# Altium PCB 摄像头小王子(1).PcbDoc
Units mil, origin at the board's own origin, x right, y up, seen from the top; angles counter-clockwise.
Board outline 6000 x 4000 mil, 2 copper layers (Top Layer, Bottom Layer); 42 components, 54 nets, 213 pads, 50 vias.
Unrouted connection lines stored in the file: 3.
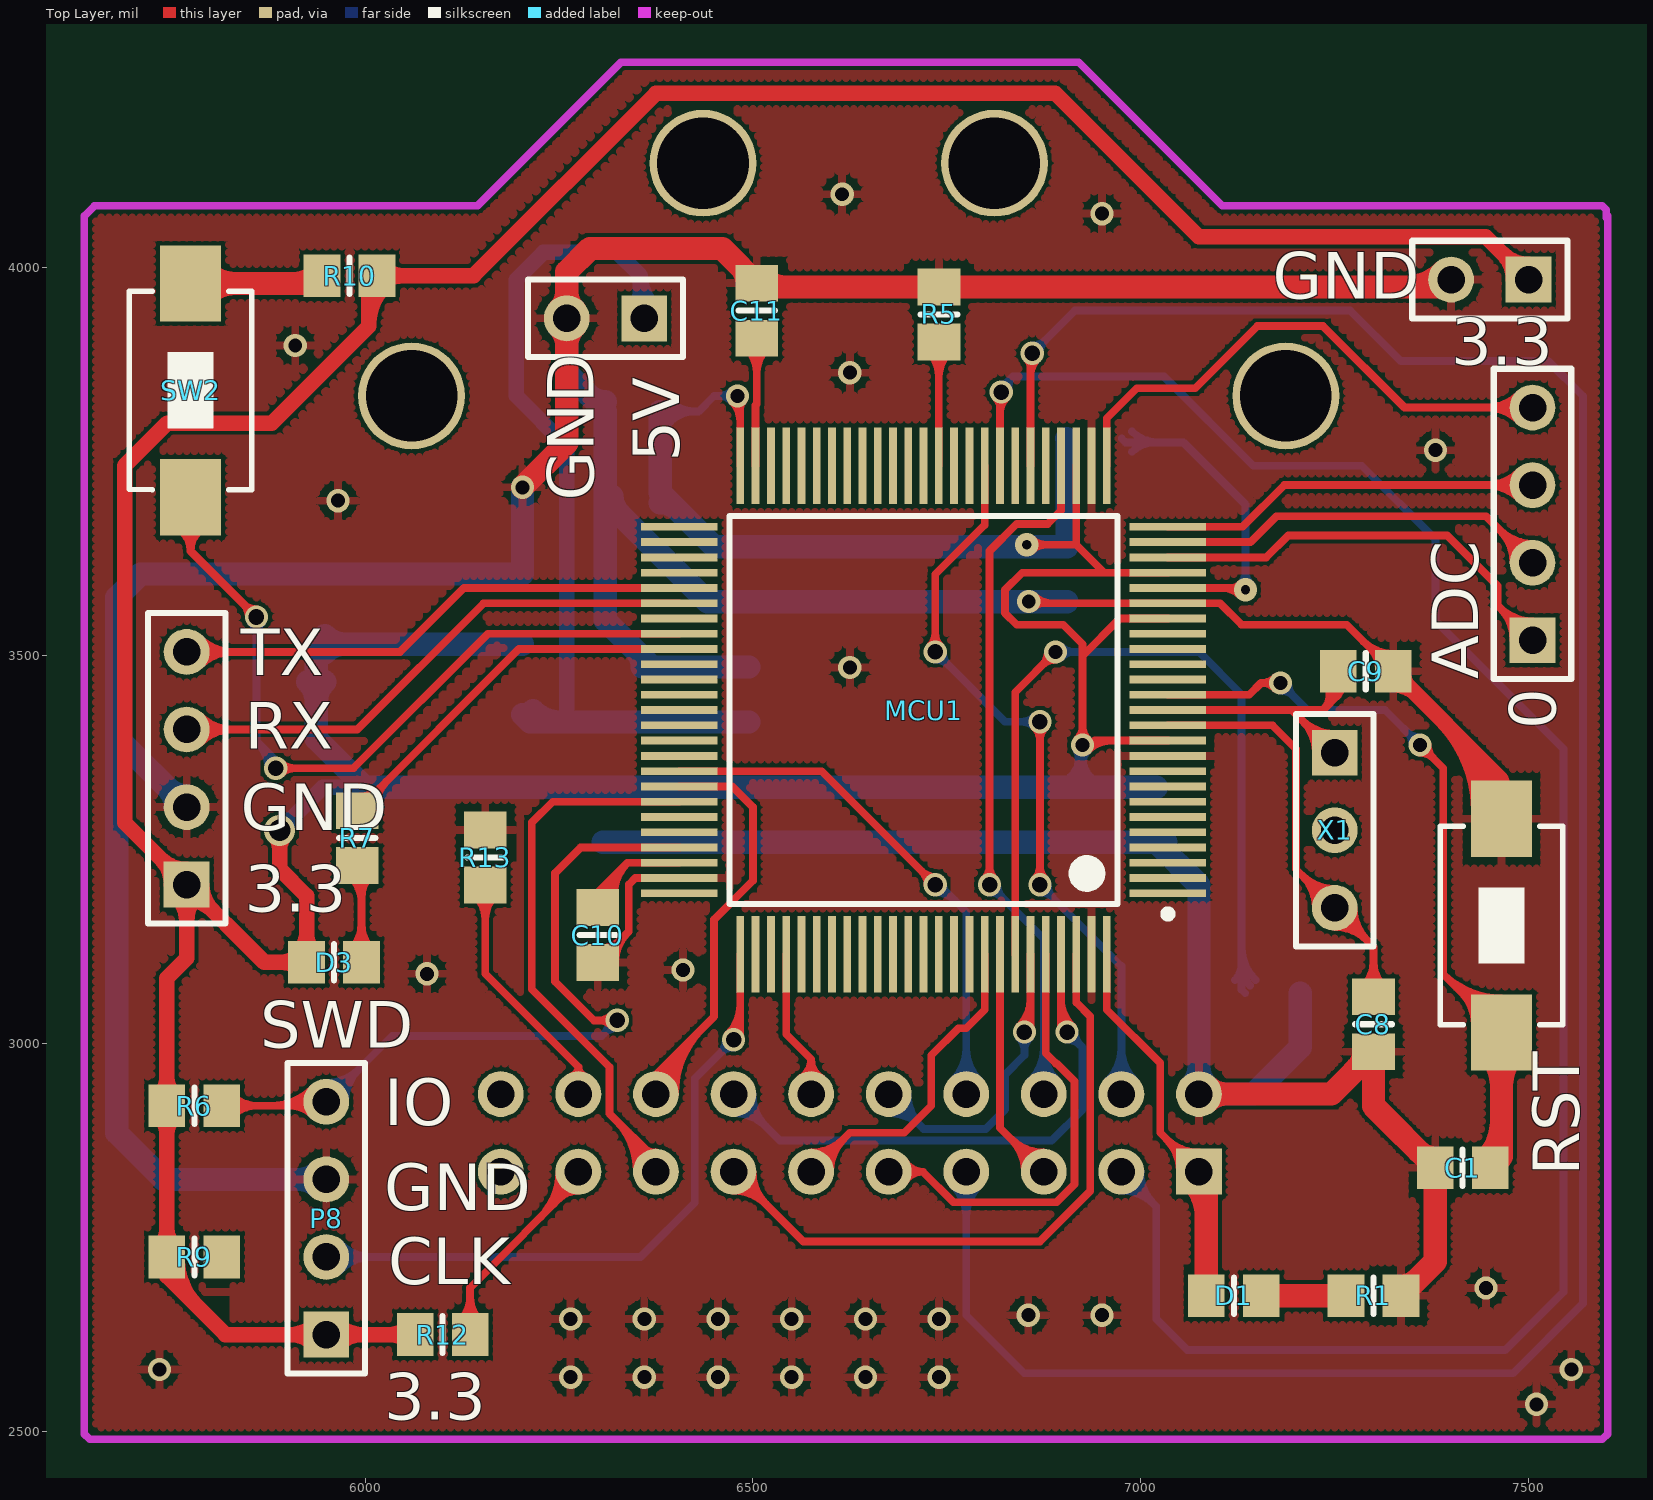
[diagram p0: Top Layer view]
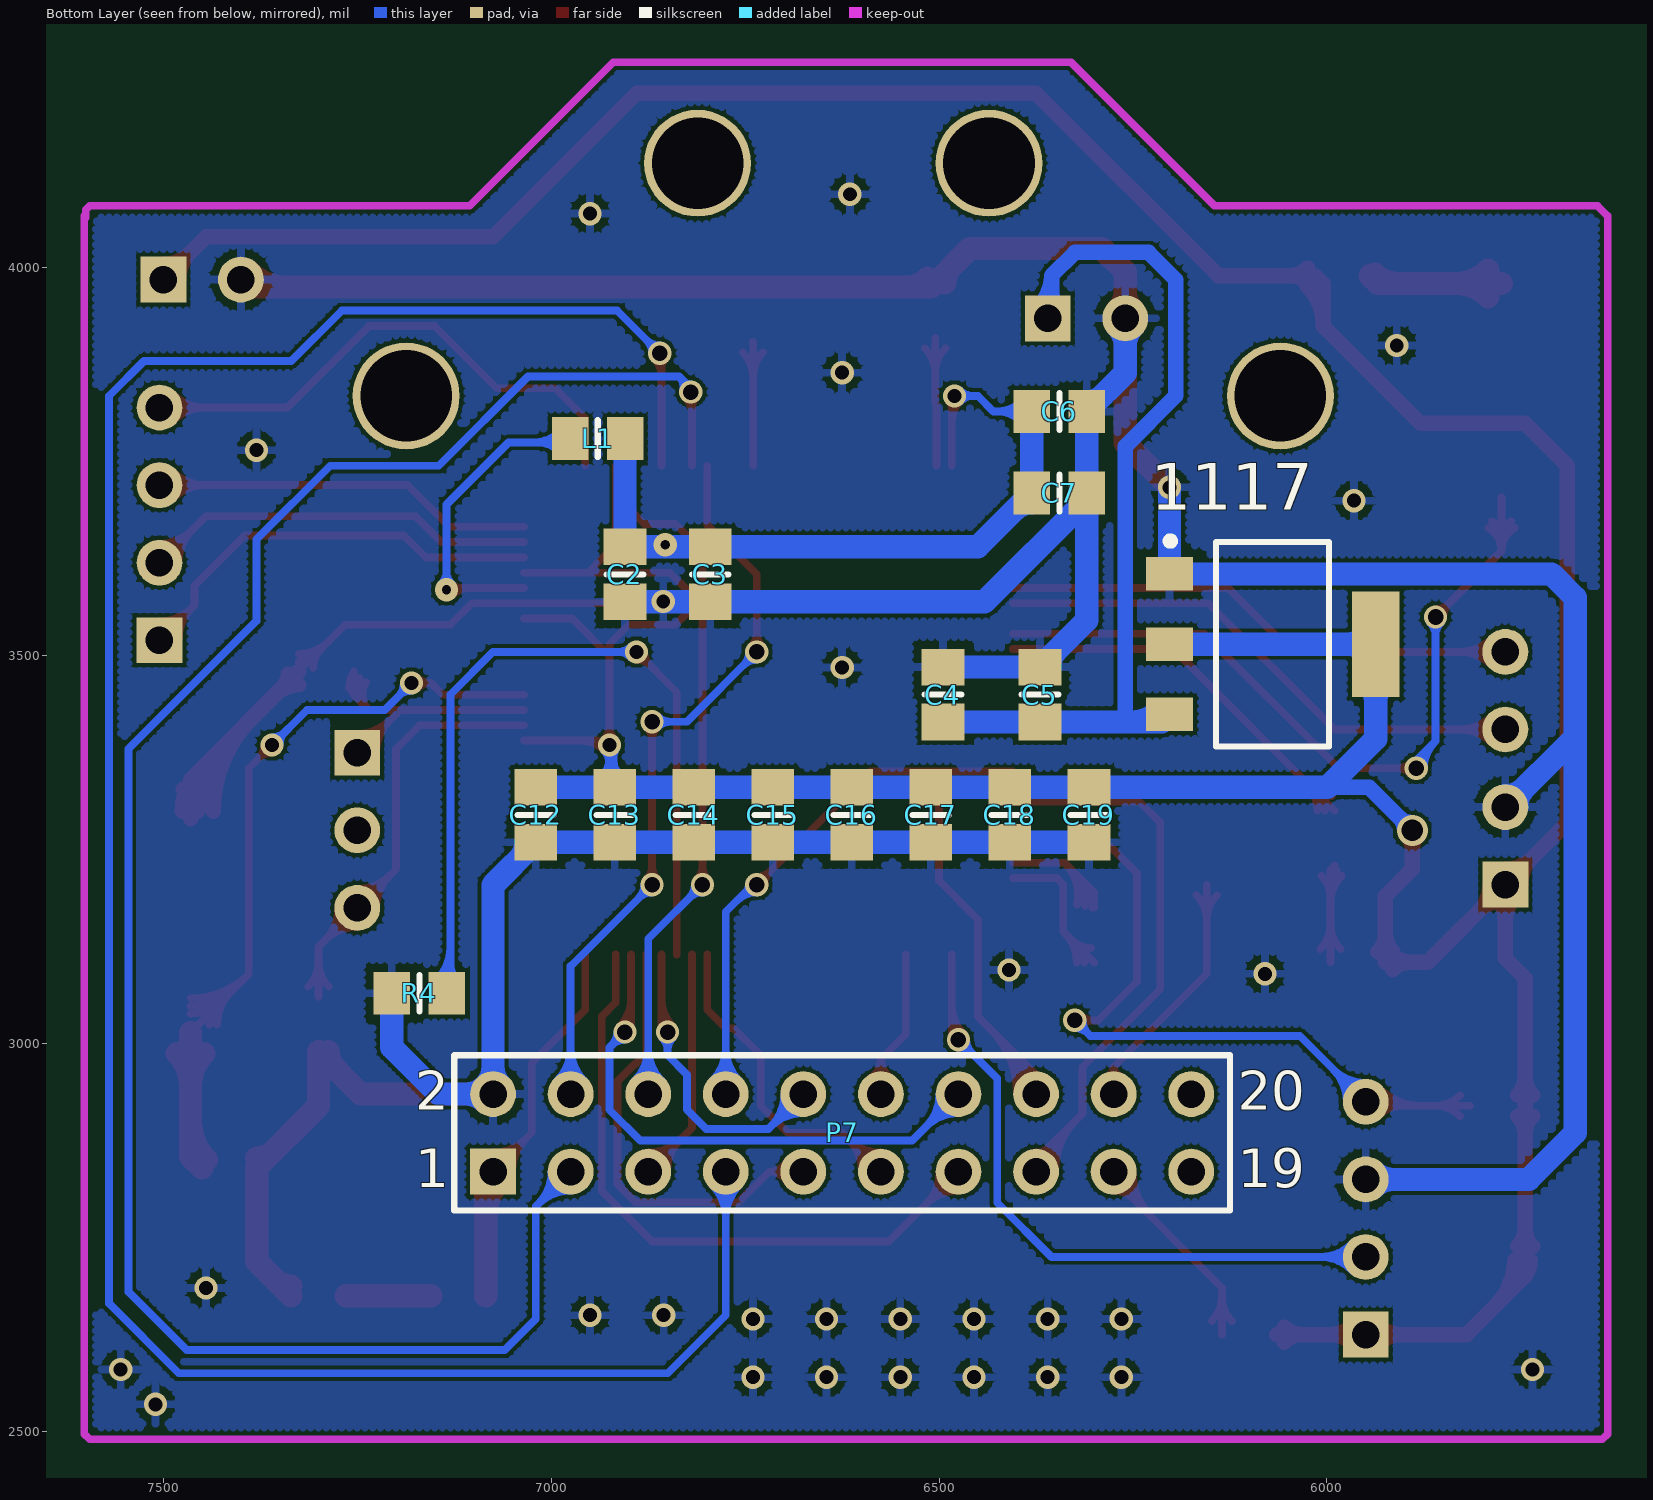
[diagram p1: Bottom Layer view, seen from below]

## Layer stack, top to bottom
Top Layer: signal copper 1.4
Dielectric: dielectric 12.6, FR-4, Dk 4.8
Bottom Layer: signal copper 1.4

## Board outline
3565,1210 9565,1210 9565,5210 3565,5210

## Design rules (kind name [scope] priority, off if disabled: settings)
Clearance [All] p1: gap=5
PolygonConnect [All] p1: connectstyle=Relief reliefconductorwidth=10 reliefentries=4 polygonreliefangle="90 Angle" airgapwidth=10
RoutingVias [All] p1: holewidth=12 width=30 viastyle="Through Hole" minholewidth=12 minwidth=30 maxholewidth=28 maxwidth=50
SolderMaskExpansion [All] p1: expansion=4
Width [All] p1: maxlimit=30 minlimit=10 preferedwidth=10
28 further rules are at their usual default settings.

## Components (designator, comment, footprint, x,y, rotation, side; value= is the part's Value field where it differs from the comment)
1117 "1117-3.3" SOT-223 6070,3515 r270 bottom (schematic designator 主控供电1)
ADC "Header 4" HDR1X4 7505,3520 r90 top (schematic designator PADC)
C1 "104" 6-0805_N 7415,2840 r0 top
C2 "Cap" 6-0805_N 6905,3605 r270 bottom
C3 "Cap" 6-0805_N 6795,3605 r270 bottom
C4 "104" 6-0805_N 6495,3450 r270 bottom
C5 "106" 6-0805_N 6370,3450 r270 bottom
C6 "104" 6-0805_N 6345,3815 r0 bottom
C7 "106" 6-0805_N 6345,3710 r0 bottom
C8 "20pF" 6-0805_N 7300,3025 r90 top
C9 "20pF" 6-0805_N 7290,3480 r180 top
C10 "2.2uF" 6-0805_N 6300,3140 r270 top
C11 "2.2uF" 6-0805_N 6505,3945 r270 top
C12 "106" 6-0805_N 7020,3295 r90 bottom
C13 "106" 6-0805_N 6918.12,3295 r90 bottom
C14 "106" 6-0805_N 6816.25,3295 r90 bottom
C15 "106" 6-0805_N 6714.38,3295 r90 bottom
C16 "104" 6-0805_N 6612.5,3295 r90 bottom
C17 "104" 6-0805_N 6510.62,3295 r90 bottom
C18 "104" 6-0805_N 6408.75,3295 r90 bottom
C19 "104" 6-0805_N 6306.88,3295 r90 bottom
D1 "3.3LED" 6-0805_N 7120,2675 r0 top
D3 "LED" 6-0805_N 5960,3105 r0 top
GND "Header 2" HDR1X2 7500,3985 r180 top (schematic designator P2)
GND "Header 2" HDR1X2 6360,3935 r180 top (schematic designator P1)
L1 "Inductor" 6-0805_N 6940,3780 r0 bottom
MCU1 "STM32F407V" LQFP100 6720,3430 r180 top
P7 "Header 10X2" HDR2X10 7075,2835 r180 bottom
P8 "Header 4" HDR1X4 5950,2625 r90 top
R1 "1K" 6-0805_N 7300,2675 r180 top
R4 "10K" 6-0805_N 7170,3065 r0 bottom
R5 "10K" 6-0805_N 6740,3940 r90 top
R6 "10K" 6-0805_N 5780,2920 r0 top
R7 "1K" 6-0805_N 5990,3265 r270 top
R9 "10K" 6-0805_N 5780,2725 r180 top
R10 "1K" 6-0805_N 5980,3990 r180 top
R12 "1K" 6-0805_N 6100,2625 r0 top
R13 "1K" 6-0805_N 6155,3240 r90 top
RST "switch" SW_PB2_A1 7465,3150 r0 top (schematic designator SW1)
SW2 "switch" SW_PB2_A1 5775,3840 r0 top
TX "Header 4" HDR1X4 5770,3205 r90 top (schematic designator P6)
X1 "xtal" HDR1X3 7250,3375 r270 top

## Footprints (in the part's own frame and the unit in brackets; to place one, negate y for a bottom-side part, rotate by r counter-clockwise, add the part's x,y. Pads: shape width x height; smd on the part's side, far side on the other; paste and mask are expansions set on the pad)
6-0805_N [mm] "Chip Resistor, Body 2.0x1.2mm, IPC Medium Density"
  rect 1.2x1.4 smd: 1(-0.9,0) 2(0.9,0)
  silkscreen extent 0,-0.6 0,0.6, body extent -1.07,-0.7 1.07,0.7, height 0.7
HDR1X2 [mm] "Connector; Header; 2 Position"
  rect 1.5x1.5 hole 0.9: 1(0,0)
  round 1.5 hole 0.9: 2(2.54,0)
  silkscreen extent -1.27,-1.27 3.81,1.27
HDR1X3 [mm] "Connector; Header; 3 Position"
  rect 1.5x1.5 hole 0.9: 1(0,0)
  round 1.5 hole 0.9: 2(2.54,0) 3(5.08,0)
  silkscreen extent -1.27,-1.27 6.35,1.27
HDR1X4 [mm] "Connector; Header; 4 Position"
  rect 1.5x1.5 hole 0.9: 1(0,0)
  round 1.5 hole 0.9: 2(2.54,0) 3(5.08,0) 4(7.62,0)
  silkscreen extent -1.27,-1.27 8.89,1.27
HDR2X10 [mm] "Connector; Header; 10x2 Position"
  rect 1.5x1.5 hole 0.9: 1(0,0)
  round 1.5 hole 0.9: 2(0,2.54) 3(2.54,0) 4(2.54,2.54) 5(5.08,0) 6(5.08,2.54) 7(7.62,0) 8(7.62,2.54) 9(10.16,0) 10(10.16,2.54) 11(12.7,0) 12(12.7,2.54) 13(15.24,0) 14(15.24,2.54) 15(17.78,0) 16(17.78,2.54) 17(20.32,0) 18(20.32,2.54) 19(22.86,0) 20(22.86,2.54)
  silkscreen extent -1.27,-1.27 24.13,3.81
LQFP100 [mm] "TSQFP, 100-Leads, Body 16.0x16.0mm (max), Pitch 0.50mm, IPC Medium Density"
  rect 2.5x0.254 smd: 1(-8,6) 2(-8,5.5) 3(-8,5) 4(-8,4.5) 5(-8,4) 6(-8,3.5) 7(-8,3) 8(-8,2.5) 9(-8,2) 10(-8,1.5) 11(-8,1) 12(-8,0.5) 13(-8,0) 14(-8,-0.5) 15(-8,-1) 16(-8,-1.5) 17(-8,-2) 18(-8,-2.5) 19(-8,-3) 20(-8,-3.5) 21(-8,-4) 22(-8,-4.5) 23(-8,-5) 24(-8,-5.5) 25(-8,-6) 51(8,-6) 52(8,-5.5) 53(8,-5) 54(8,-4.5) 55(8,-4) 56(8,-3.5) 57(8,-3) 58(8,-2.5) 59(8,-2) 60(8,-1.5) 61(8,-1) 62(8,-0.5) 63(8,0) 64(8,0.5) 65(8,1) 66(8,1.5) 67(8,2) 68(8,2.5) 69(8,3) 70(8,3.5) 71(8,4) 72(8,4.5) 73(8,5) 74(8,5.5) 75(8,6)
  rect 0.254x2.5 smd: 26(-6,-8) 27(-5.5,-8) 28(-5,-8) 29(-4.5,-8) 30(-4,-8) 31(-3.5,-8) 32(-3,-8) 33(-2.5,-8) 34(-2,-8) 35(-1.5,-8) 36(-1,-8) 37(-0.5,-8) 38(0,-8) 39(0.5,-8) 40(1,-8) 41(1.5,-8) 42(2,-8) 43(2.5,-8) 44(3,-8) 45(3.5,-8) 46(4,-8) 47(4.5,-8) 48(5,-8) 49(5.5,-8) 50(6,-8) 76(6,8) 77(5.5,8) 78(5,8) 79(4.5,8) 80(4,8) 81(3.5,8) 82(3,8) 83(2.5,8) 84(2,8) 85(1.5,8) 86(1,8) 87(0.5,8) 88(0,8) 89(-0.5,8) 90(-1,8) 91(-1.5,8) 92(-2,8) 93(-2.5,8) 94(-3,8) 95(-3.5,8) 96(-4,8) 97(-4.5,8) 98(-5,8) 99(-5.5,8) 100(-6,8)
  silkscreen extent -8.13,-6.35 6.35,6.8
SOT-223 [mm]
  rect 1.1x1.55 smd: 1(-2.3,-3.375) 2(0,-3.375) 3(2.3,-3.375)
  rect 3.45x1.55 smd: 4(0,3.375)
  silkscreen extent -3.5,-3.48 3.35,1.85, body extent -3.3,-3.94 3.3,3.43, height 0.8
SW_PB2_A1 [mm]
  rect 2x2.5 smd: 1(0,3.556) 2(0,-3.444)
  silkscreen extent -2,-3.19 2,3.31, body extent -2.03,-3.17 2.03,3.3, height 1.2

## Part data
1117: library part 1117M3-3.3
ADC P8 TX: "Header, 4-Pin"
C1 C4 C5 C6 C7 C8 C9 C10 C11 C12 C13 C14 C15 C16 C17 C18 C19: library part cap
C2 C3: "Capacitor"
D1: library part LED
GND GND: "Header, 2-Pin"
MCU1: library part stm32f407
P7: "Header, 10-Pin, Dual row"
R1 R4 R5 R6 R7 R9 R10 R12 R13: library part resistor, "small resistor"
RST SW2: library part switch-1

## Free pads (board coordinates)
  round 137.8 hole 118.11: 2(6060,3835) 2(6435.67,4135) 2(6811.34,4135) 2(7187.01,3835)

## Via types
v1: diameter 30, hole 18, Top Layer to Bottom Layer, 34 vias
v2: diameter 30, hole 20, Top Layer to Bottom Layer, 13 vias
v3: diameter 30, hole 12, Top Layer to Bottom Layer, 2 vias
v4: diameter 40, hole 28, Top Layer to Bottom Layer, 1 vias

## Nets (pads, with @x,y where several pads share a name; then routed paths per layer and width w, separated by ;. In a path a pad name is that pad's centre, name@x,y a point inside that pad or via, vN(x,y) a via of type N, cw(c..) or ccw(c..) an arc to the next point about the centre after c; other vN are vias at no path point)
+3.3: 1117.2 1117.4 C2.1 C3.1 C6.2 C7.2 C12.2 C13.2 C14.2 C15.2 C16.2 C17.2 C18.2 C19.2 D1.1 D3.1 GND.1@7500,3985 L1.1 MCU1.11 MCU1.19 MCU1.22 MCU1.28 MCU1.50 MCU1.75 MCU1.100 P7.1 P8.1 R6.1 R9.2 R10.1 R12.1 TX.1 | length 9893.1
  Top Layer w10: v1@6472.93,3827.93 cw(c6446.73,3801.73) 6483.78,3801.73 ; v1(6480,3835) 6483.78,3831.22 MCU1.50 ; 6483.78,3819.98 cw(c6495.02,3819.98) v1@6487.07,3827.93 ; v3(6853.15,3643.15) 6916.85,3643.15 ; v3@6860.22,3636.08 cw(c6877.29,3619.01) 6877.29,3643.15 cw(c6877.29,3667.29) v3@6860.22,3650.22 ; MCU1.28 6916.85,3643.15 ; v1@6917.93,3392.07 ccw(c6900.86,3409.14) 6925,3409.14 ccw(c6949.14,3409.14) v1@6932.07,3392.07 ; v1@6932.07,3377.93 cw(c6962.73,3347.27) 6962.73,3390.63 ; MCU1.100 6956.22,3043.78 7025,2975 7025,2885 P7.1 ; MCU1.11 6940.63,3390.63 6930,3380 v1(6925,3385) 6925,3500 ; MCU1.19 6973.11,3548.11 6925,3500 ; MCU1.22 6952.83,3607.17 ; P7.1@7050.47,2835 ccw(c6991.26,2835) 7033.13,2876.87 ccw(c7075,2918.74) P7.1@7075,2859.53 ; P7.1@7060.47,2835 ccw(c7025.4,2835) 7050.2,2859.8 ccw(c7075,2884.6) P7.1@7075,2849.53 ; 6916.85,3643.15 6952.83,3607.17 ; 6925,3500 6925,3515 6900,3540 6840,3540 6825,3555 6825,3585 6847.17,3607.17 6952.83,3607.17
  Top Layer w20: R9.2@5734.93,2738.57 ccw(c5711.68,2761.82) 5744.57,2761.82 ccw(c5777.45,2761.82) R9.2@5754.2,2738.57 ; R6.1@5734.93,2906.43 cw(c5711.68,2883.18) 5744.57,2883.18 cw(c5777.45,2883.18) R6.1@5754.2,2906.43 ; R6.1@5734.93,2933.57 ccw(c5711.68,2956.82) 5744.57,2956.82 ccw(c5777.45,2956.82) R6.1@5754.2,2933.57 ; R9.2@5738.19,2721.06 ccw(c5772.6,2721.06) 5748.27,2696.73 ; TX.1@5750.47,3205 ccw(c5703.33,3205) 5736.66,3238.34 ccw(c5770,3271.67) TX.1@5770,3224.53 ; TX.1@5756.19,3191.19 cw(c5722.86,3157.86) 5770,3157.86 cw(c5817.14,3157.86) TX.1@5783.81,3191.19 ; R9.2@5758.19,2721.06 ccw(c5840.88,2721.06) 5782.41,2662.59 ; TX.1@5770,3185.47 cw(c5770,3138.33) 5803.34,3171.66 cw(c5836.67,3205) TX.1@5789.53,3205 ; v4@5882.93,3267.93 cw(c5865.86,3250.86) 5890,3250.86 cw(c5914.14,3250.86) v4@5897.07,3267.93 ; v4(5890,3275) 5890,3225 5924.57,3190.43 D3.1 5870,3105 TX.1 ; D3.1@5914.93,3095.37 ccw(c5891.68,3072.11) 5891.68,3105 ccw(c5891.68,3137.89) D3.1@5914.93,3114.63 ; D3.1@5914.93,3118.57 ccw(c5891.68,3141.82) 5924.57,3141.82 ccw(c5957.45,3141.82) D3.1@5934.2,3118.57 ; P8.1@5936.19,2611.19 ccw(c5902.86,2577.86) 5902.86,2625 ccw(c5902.86,2672.14) P8.1@5936.19,2638.81 ; P8.1@5963.81,2611.19 cw(c5997.14,2577.86) 5997.14,2625 cw(c5997.14,2672.14) P8.1@5963.81,2638.81 ; 6005,3927.99 cw(c6073.51,3927.99) R10.1@6025.07,3976.43 ; R10.1@6025.07,3980.37 cw(c6048.32,3957.11) 6048.32,3990 cw(c6048.32,4022.89) R10.1@6025.07,3999.63 ; R12.1@6054.93,2615.37 ccw(c6031.68,2592.11) 6031.68,2625 ccw(c6031.68,2657.89) R12.1@6054.93,2634.63 ; R12.1 5820,2625 5744.57,2700.43 R9.2 R6.1 5744.57,3084.57 5770,3110 TX.1 ; GND.1@7480.47,3985 ccw(c7433.33,3985) 7466.66,4018.34 ccw(c7500,4051.67) GND.1@7500,4004.53 ; GND.1@7500,3985 7445,4040 7075,4040 6890,4225 6375,4225 6140,3990 R10.1 6005,3979.57 6005,3925 5880,3800 5745,3800 5690,3745 5690,3285 TX.1
  Top Layer w30: P7.1@7064.73,2824.73 cw(c7016.83,2776.83) 7084.57,2776.83 ; P7.1 7084.57,2825.43 D1.1
  Bottom Layer w10: C6.2 6430,3815 6450,3835 v1(6480,3835) ; C6.2@6393.6,3801.83 cw(c6425.39,3770.04) 6425.39,3815 cw(c6425.39,3859.96) C6.2@6393.6,3828.17 ; v1@6472.93,3827.93 ccw(c6455.86,3810.86) 6455.86,3835 ccw(c6455.86,3859.14) v1@6472.93,3842.07 ; C13.2@6908.89,3343.6 ccw(c6870.01,3382.48) v1@6925,3382.48 ; C13.2@6915.97,3336.53 ccw(c6894.15,3358.34) 6925,3358.34 ; v1@6916.34,3380 cw(c6893.51,3366.82) 6918.97,3359.99 ; v1@6917.93,3377.93 cw(c6900.86,3360.86) 6925,3360.86 cw(c6949.14,3360.86) v1@6932.07,3377.93 ; C13.2 6925,3337.31 v1(6925,3385) ; 6919.79,3363.03 cw(c6940.96,3357.36) v1@6930,3376.34 ; 6925,3368.3 ccw(c6959.93,3368.3) C13.2@6935.23,3343.6
  Bottom Layer w20: v4(5890,3275) 5945.43,3330.43 5999.57,3330.43 ; v4@5890,3285 ccw(c5890,3309.14) 5907.07,3292.07 ccw(c5924.14,3275) v4@5900,3275
  Bottom Layer w30: 1117.4@5926.16,3466.63 cw(c5899.68,3440.15) 5937.13,3440.15 cw(c5974.57,3440.15) 1117.4@5948.09,3466.63 ; 1117.4@5948.09,3504.03 cw(c5974.57,3477.55) 5974.57,3515 cw(c5974.57,3552.45) 1117.4@5948.09,3525.97 ; 1117.2 1117.4 5937.13,3392.87 5999.57,3330.43 C19.2 C18.2 C17.2 C16.2 C15.2 C14.2 C13.2 C12.2 ; C7.2@6380.43,3697.44 cw(c6380.43,3667.12) C7.2@6401.87,3688.56 ; C6.2 C7.2 6450,3640.43 C3.1 C2.1 6905,3779.57 L1.1
+5: 1117.3 C4.2 C5.2 GND.1@6360,3935 | length 1245.9
  Bottom Layer w20: 6260,3414.57 6260,3770 6195,3835 6195,3985 6230,4020 6325,4020 6355,3990 ; GND.1@6346.19,3948.81 ccw(c6324.93,3970.07) 6355,3970.07 ; GND.1@6360,3935 6355,3940 6355,3990 ; GND.1@6373.05,3949.53 cw(c6409.39,3990) 6355,3990
  Bottom Layer w30: 1117.3 6212.76,3414.57 6260,3414.57 C5.2 C4.2 ; 1117.3@6216.44,3429.15 ccw(c6251.66,3464.37) 6251.66,3414.57
ADC0: ADC.1 MCU1.23 | length 700.4
  Top Layer w10: MCU1.23 7161.85,3626.85 7190,3655 7395,3655 7460,3590 7460,3565 ADC.1 ; ADC.1@7480.47,3520 ccw(c7421.26,3520) 7463.13,3561.87 ccw(c7505,3603.74) ADC.1@7505,3544.53 ; ADC.1@7490.47,3520 ccw(c7455.4,3520) 7480.2,3544.8 ccw(c7505,3569.6) ADC.1@7505,3534.53
ADC1: ADC.2 MCU1.24 | length 656.9
  Top Layer w10: MCU1.24 7141.54,3646.54 7175,3680 7445,3680 ADC.2 ; ADC.2@7480.47,3620 ccw(c7421.26,3620) 7463.13,3661.87 ccw(c7505,3703.74) ADC.2@7505,3644.53 ; ADC.2@7490.47,3620 ccw(c7455.4,3620) 7480.2,3644.8 ccw(c7505,3669.6) ADC.2@7505,3634.53
ADC2: ADC.3 MCU1.25 | length 640.4
  Top Layer w10: MCU1.25 7131.22,3666.22 7185,3720 ADC.3 ; ADC.3@7487.66,3702.66 ccw(c7445.79,3660.79) 7445.79,3720 ccw(c7445.79,3779.21) ADC.3@7487.66,3737.34 ; ADC.3@7494.73,3709.73 ccw(c7469.93,3684.93) 7469.93,3720 ccw(c7469.93,3755.07) ADC.3@7494.73,3730.27
ADC3: ADC.4 MCU1.26 | length 850.8
  Top Layer w10: MCU1.26 6956.22,3806.22 6995,3845 7070,3845 7150,3925 7235,3925 7340,3820 ADC.4 ; ADC.4@7487.66,3802.66 ccw(c7445.79,3760.79) 7445.79,3820 ccw(c7445.79,3879.21) ADC.4@7487.66,3837.34 ; ADC.4@7494.73,3809.73 ccw(c7469.93,3784.93) 7469.93,3820 ccw(c7469.93,3855.07) ADC.4@7494.73,3830.27
BLUERX: MCU1.56 TX.3 | length 850.6
  Top Layer w10: TX.3 5990,3405 6152.8,3567.8 MCU1.56 ; TX.3@5780.27,3394.73 cw(c5805.07,3369.93) 5805.07,3405 cw(c5805.07,3440.07) TX.3@5780.27,3415.27 ; TX.3@5787.34,3387.66 cw(c5829.21,3345.79) 5829.21,3405 cw(c5829.21,3464.21) TX.3@5787.34,3422.34
BLUETX: MCU1.55 TX.4 | length 817.3
  Top Layer w10: TX.4 6045,3505 6127.48,3587.48 MCU1.55 ; TX.4@5780.27,3494.73 cw(c5805.07,3469.93) 5805.07,3505 cw(c5805.07,3540.07) TX.4@5780.27,3515.27 ; TX.4@5787.34,3487.66 cw(c5829.21,3445.79) 5829.21,3505 cw(c5829.21,3564.21) TX.4@5787.34,3522.34
CAM_SCL: MCU1.33 P7.3 | length 2788.4
  Top Layer w10: v2@6812.93,3832.93 cw(c6799.66,3819.66) 6818.43,3819.66 ; MCU1.33 6818.43,3838.43 v2(6820,3840) ; 6818.43,3812.06 cw(c6847.94,3812.06) v2@6827.07,3832.93
  Bottom Layer w10: v2(6820,3840) 6820,3845 6835,3860 ; v2@6820,3850 ccw(c6820,3862.07) 6828.54,3853.54 ; v2@6829.77,3842.14 cw(c6848.71,3846.29) 6835,3860 ; P7.3@6975,2810.47 cw(c6975,2751.26) 7016.87,2793.13 cw(c7058.74,2835) P7.3@6999.53,2835 ; P7.3@6975,2820.47 cw(c6975,2785.4) 6999.8,2810.2 cw(c7024.6,2835) P7.3@6989.53,2835 ; P7.3 7020,2790 7020,2645 7060,2605 7470,2605 7545,2680 7545,3380 7380,3545 7380,3650 7285,3745 7145,3745 7030,3860 6835,3860
CAM_SDA: MCU1.34 P7.4 | length 1337.8
  Top Layer w10: v2@6727.93,3512.07 ccw(c6710.86,3529.14) 6735,3529.14 ccw(c6759.14,3529.14) v2@6742.07,3512.07 ; v2(6735,3505) 6735,3605 6798.74,3668.74 MCU1.34 ; v2@6862.93,3212.07 ccw(c6845.86,3229.14) 6870,3229.14 ccw(c6894.14,3229.14) v2@6877.07,3212.07 ; v2@6862.93,3407.93 cw(c6845.86,3390.86) 6870,3390.86 cw(c6894.14,3390.86) v2@6877.07,3407.93 ; v2(6870,3205) v2(6870,3415)
  Bottom Layer w10: v2@6735,3495 cw(c6735,3470.86) 6752.07,3487.93 cw(c6769.14,3505) v2@6745,3505 ; v2(6735,3505) 6825,3415 v2(6870,3415) ; v2@6862.93,3407.93 ccw(c6845.86,3390.86) 6845.86,3415 ccw(c6845.86,3439.14) v2@6862.93,3422.07 ; v2@6870,3195 cw(c6870,3170.86) 6887.07,3187.93 cw(c6904.14,3205) v2@6880,3205 ; v2(6870,3205) 6975,3100 P7.4 ; P7.4@6957.66,2952.34 ccw(c6915.79,2994.21) 6975,2994.21 ccw(c7034.21,2994.21) P7.4@6992.34,2952.34 ; P7.4@6964.73,2945.27 ccw(c6939.93,2970.07) 6975,2970.07 ccw(c7010.07,2970.07) P7.4@6985.27,2945.27
CLK: MCU1.67 P7.8 | length 911.1
  Top Layer w10: MCU1.67 6588.74,3351.26 v2(6735,3205) ; v2@6725,3205 ccw(c6700.86,3205) 6717.93,3222.07 ccw(c6735,3239.14) v2@6735,3215
  Bottom Layer w10: v2@6735,3195 cw(c6735,3158.79) 6760.61,3184.39 ; v2(6735,3205) 6735,3210 6775,3170 P7.8 ; v2@6745,3205 ccw(c6757.07,3205) 6748.54,3196.46 ; P7.8@6757.66,2952.34 ccw(c6715.79,2994.21) 6775,2994.21 ccw(c6834.21,2994.21) P7.8@6792.34,2952.34 ; P7.8@6764.73,2945.27 ccw(c6739.93,2970.07) 6775,2970.07 ccw(c6810.07,2970.07) P7.8@6785.27,2945.27
DCMI_D0: MCU1.68 P7.16 | length 789.6
  Top Layer w10: P7.16@6369.53,2935 cw(c6416.67,2935) 6383.34,2968.34 ; P7.16 6375,2960 6450,3035 6450,3160 6500,3210 6500,3305 6473.43,3331.57 MCU1.68 ; P7.16@6379.53,2935 cw(c6450.81,2935) 6400.41,2985.41 ; P7.16@6389.53,2935 cw(c6484.96,2935) 6417.48,3002.48 ; P7.16@6399.53,2935 cw(c6519.1,2935) 6434.55,3019.55
DCMI_D1: MCU1.69 P7.15 | length 903.5
  Top Layer w10: 6322.52,2902.48 cw(c6255.04,2835) P7.15@6350.47,2835 ; 6339.59,2885.41 cw(c6289.19,2835) P7.15@6360.47,2835 ; 6356.66,2868.34 cw(c6323.33,2835) P7.15@6370.47,2835 ; 6358.74,2866.26 ccw(c6375,2882.53) P7.15@6375,2859.53 ; P7.15 6375,2850 6315,2910 6315,2970 6215,3070 6215,3285 6241.89,3311.89 MCU1.69
DCMI_D2: MCU1.97 P7.14 | length 950
  Top Layer w10: 6897.17,3033.91 ccw(c6923.91,3033.91) v2(6905,3015) 6897.17,3022.83 MCU1.97 ; 6897.17,3058.06 ccw(c6948.06,3058.06) v2@6912.07,3022.07
  Bottom Layer w10: P7.14@6475,2910.47 cw(c6475,2851.26) 6516.87,2893.13 cw(c6558.74,2935) P7.14@6499.53,2935 ; P7.14@6475,2920.47 cw(c6475,2885.4) 6499.8,2910.2 cw(c6524.6,2935) P7.14@6489.53,2935 ; P7.14 6535,2875 6885,2875 6925,2915 6925,2995 v2(6905,3015) ; v2@6905,3005 cw(c6905,2980.86) 6922.07,2997.93 cw(c6939.14,3015) v2@6915,3015
DCMI_D3: MCU1.98 P7.13 | length 984.9
  Top Layer w10: P7.13@6475,2810.47 cw(c6475,2751.26) 6516.87,2793.13 cw(c6558.74,2835) P7.13@6499.53,2835 ; P7.13@6475,2820.47 cw(c6475,2785.4) 6499.8,2810.2 cw(c6524.6,2835) P7.13@6489.53,2835 ; P7.13 6565,2745 6870,2745 6935,2810 6935,3035 6916.85,3053.15 MCU1.98
DCMI_D4: MCU1.79 P7.12 | length 251.3
  Top Layer w10: MCU1.79 6542.83,3012.17 6575,2980 ; P7.12@6561.71,2955.61 ccw(c6545.99,2980) 6575,2980 ; P7.12 6575,2980 ; P7.12@6588.29,2955.61 cw(c6604.01,2980) 6575,2980
DCMI_D5: MCU1.92 P7.11 | length 567.7
  Top Layer w10: P7.11 6625,2885 6695,2885 6730,2920 6730,2985 6765,3020 6775,3020 6798.74,3043.74 MCU1.92 ; P7.11@6575,2849.53 ccw(c6575,2884.6) 6599.8,2859.8 ccw(c6624.6,2835) P7.11@6589.53,2835 ; P7.11@6575,2859.53 ccw(c6575,2918.74) 6616.87,2876.87 ccw(c6658.74,2835) P7.11@6599.53,2835
DCMI_D6: MCU1.95 P7.10 | length 639.4
  Top Layer w10: v2@6842.93,3022.07 ccw(c6807.04,3057.96) 6857.8,3057.96 ; 6857.8,3033.82 cw(c6831.18,3033.82) v2(6850,3015) 6857.8,3022.8 MCU1.95
  Bottom Layer w10: P7.10@6675,2910.47 cw(c6675,2851.26) 6716.87,2893.13 cw(c6758.74,2935) P7.10@6699.53,2935 ; P7.10@6675,2920.47 cw(c6675,2885.4) 6699.8,2910.2 cw(c6724.6,2935) P7.10@6689.53,2935 ; P7.10 6720,2890 6800,2890 6825,2915 6825,2960 6850,2985 v2(6850,3015) ; v2@6842.93,3007.93 cw(c6825.86,2990.86) 6850,2990.86 cw(c6874.14,2990.86) v2@6857.07,3007.93
DCMI_D7: MCU1.96 P7.9 | length 633.4
  Top Layer w10: P7.9 6719.1,2835 ; P7.9@6695.84,2822.06 cw(c6719.1,2807.62) 6719.1,2835 ; P7.9@6695.84,2847.94 ccw(c6719.1,2862.38) 6719.1,2835 ; MCU1.96 6877.48,2987.52 6890.47,2974.53 6891.37,2974.53 6914.53,2951.37 6914.53,2818.63 6891.37,2795.47 6758.63,2795.47 6719.1,2835
DCMI_HSYNC: MCU1.29 P7.6 | length 1129.5
  Top Layer w10: v2@6797.93,3212.07 ccw(c6780.86,3229.14) 6805,3229.14 ccw(c6829.14,3229.14) v2@6812.07,3212.07 ; v2(6805,3205) 6805,3635 6840,3670 6880,3670 6897.17,3687.17 MCU1.29
  Bottom Layer w10: v2@6805,3195 cw(c6805,3170.86) 6822.07,3187.93 cw(c6839.14,3205) v2@6815,3205 ; v2@6805,3210 v2(6805,3205) 6875,3135 P7.6 ; P7.6@6857.66,2952.34 ccw(c6815.79,2994.21) 6875,2994.21 ccw(c6934.21,2994.21) P7.6@6892.34,2952.34 ; P7.6@6864.73,2945.27 ccw(c6839.93,2970.07) 6875,2970.07 ccw(c6910.07,2970.07) P7.6@6885.27,2945.27
DCMI_PIXCLK: MCU1.31 P7.7 | length 3363.5
  Top Layer w10: v2@6852.93,3882.93 cw(c6841.18,3871.18) 6857.8,3871.18 ; MCU1.31 v2@6857.8,3887.8 ; 6857.8,3860.53 cw(c6889.47,3860.53) v2@6867.07,3882.93
  Bottom Layer w10: P7.7@6757.66,2817.66 cw(c6715.79,2775.79) 6775,2775.79 cw(c6834.21,2775.79) P7.7@6792.34,2817.66 ; P7.7@6764.73,2824.73 cw(c6739.93,2799.93) 6775,2799.93 cw(c6810.07,2799.93) P7.7@6785.27,2824.73 ; P7.7 6775,2650 6850,2575 7480,2575 7570,2665 7570,3835 7525,3880 7335,3880 7270,3945 6915,3945 v2(6860,3890) ; v2@6860,3900 ccw(c6860,3924.14) 6877.07,3907.07 ccw(c6894.14,3890) v2@6870,3890
DCMI_VSYNC: MCU1.93 P7.5 | length 451.6
  Top Layer w10: MCU1.93 6818.43,2891.57 P7.5 ; P7.5@6850.47,2835 ccw(c6791.26,2835) 6833.13,2876.87 ccw(c6875,2918.74) P7.5@6875,2859.53 ; P7.5@6860.47,2835 ccw(c6825.4,2835) 6850.2,2859.8 ccw(c6875,2884.6) P7.5@6875,2849.53
GND: 1117.1 C1.1 C2.2 C3.2 C4.1 C5.1 C6.1 C7.1 C8.1 C9.1 C10.2 C11.1 C12.1 C13.1 C14.1 C15.1 C16.1 C17.1 C18.1 C19.1 GND.2 MCU1.10 MCU1.20 MCU1.27 MCU1.74 MCU1.99 P7.2 P8.3 R1.1 R4.2 R5.2 R13.2 RST.1 TX.2 | length 8673.8
  Top Layer w10: C10.2 6340,3144.57 6340,3205 6348.46,3213.46 MCU1.74 ; C10.2@6303.94,3123.19 ccw(c6303.94,3158.64) 6329.01,3133.57 ; C10.2@6312.56,3104.57 cw(c6342.88,3104.57) C10.2@6321.44,3126.01 ; C10.2@6322.56,3104.57 cw(c6377.02,3104.57) 6338.51,3143.08 ; v1@6850,3570 v1(6855.59,3570) 6857.8,3567.8 MCU1.20 7102.2,3567.8 7130,3540 7265.43,3540 C9.1 ; v1@6862.66,3562.93 cw(c6874.41,3551.18) 6874.41,3567.8 ; v1@6862.66,3577.07 ccw(c6885.06,3599.46) 6885.06,3567.8 ; 6930,3975.43 6936.54,3968.9 ; 7286.92,3518.51 ccw(c7325.43,3557.02) C9.1@7325.43,3502.56 ; 7296.43,3509.01 cw(c7271.36,3483.94) C9.1@7306.81,3483.94 ; C9.1@7303.99,3501.44 ccw(c7325.43,3522.88) C9.1@7325.43,3492.56
  Top Layer w20: C9.1@7325.43,3462.44 cw(c7325.43,3420.05) 7355.41,3450.02 ; C9.1 7465,3340.43 ; C9.1@7339.06,3476.06 ccw(c7362.44,3476.06) C9.1@7345.9,3459.53 ; 7386.16,3419.27 cw(c7266.73,3299.84) RST.1@7435.63,3299.84 ; 7420.3,3385.13 cw(c7335.02,3299.84) RST.1@7455.63,3299.84 ; 7454.44,3350.99 cw(c7403.3,3299.84) RST.1@7475.63,3299.84 ; RST.1@7455.82,3327.74 ccw(c7451.64,3340.43) 7465,3340.43 ; RST.1 7465,3340.43 ; RST.1@7474.18,3327.74 cw(c7478.36,3340.43) 7465,3340.43
  Top Layer w30: v1(6202.87,3717.13) 6260,3774.25 6260,3935 6260,3995 6290,4025 6460.43,4025 C11.1 6510,3975.43 R5.2 6930,3975.43 7390.43,3975.43 GND.2@7400,3985 ; GND.2@6249.73,3924.73 cw(c6224.93,3899.93) 6260,3899.93 cw(c6295.07,3899.93) GND.2@6270.27,3924.73 ; GND.2@6249.73,3945.27 ccw(c6224.93,3970.07) 6260,3970.07 ccw(c6295.07,3970.07) GND.2@6270.27,3945.27 ; C11.1@6483.56,4001.87 cw(c6462.12,3980.43) C11.1@6492.44,3980.43 ; C11.1@6515.03,3986.53 ccw(c6541.82,4013.32) 6541.82,3975.43 ; P7.2 7245.43,2935 C8.1 7300,2919.57 C1.1 7379.57,2719.13 R1.1 ; P7.2@7085.27,2924.73 cw(c7110.07,2899.93) 7110.07,2935 cw(c7110.07,2970.07) P7.2@7085.27,2945.27 ; C8.1@7278.56,2968.13 ccw(c7257.12,2989.57) C8.1@7287.44,2989.57 ; R1.1@7335.43,2687.56 ccw(c7335.43,2717.88) R1.1@7356.87,2696.44 ; 7341.83,3975.43 ccw(c7341.83,4043.17) GND.2@7389.73,3995.27 ; C1.1@7358.13,2861.44 ccw(c7379.57,2882.88) C1.1@7379.57,2852.56
  Bottom Layer w30: TX.2@5755.47,3305 ccw(c5720.4,3305) 5745.2,3329.8 ccw(c5770,3354.6) TX.2@5770,3319.53 ; TX.2 5680,3395 ; P8.3@5939.73,2814.73 ccw(c5914.93,2789.93) 5914.93,2825 ccw(c5914.93,2860.07) P8.3@5939.73,2835.27 ; P8.3 5740,2825 5680,2885 5680,3395 ; v1(6202.87,3717.13) 1117.1 5710.55,3605.55 5680,3575 5680,3395 ; GND.2@6249.73,3924.73 cw(c6224.93,3899.93) 6260,3899.93 cw(c6295.07,3899.93) GND.2@6270.27,3924.73 ; GND.2@6260,3935 6260,3864.57 C6.1 C7.1 C7.1@6309.57,3701.4 ; C6.1@6288.13,3836.44 ccw(c6309.57,3857.88) C6.1@6309.57,3827.56 ; C19.1 C18.1 C17.1 C16.1 C15.1 C14.1 C13.1 C12.1 7075,3204.57 P7.2 7145,2935 7205.43,2995.43 R4.2 ; C7.1@6318.19,3706.06 ccw(c6350.26,3706.06) C7.1@6327.58,3683.39 ; C5.1@6348.56,3506.87 cw(c6327.12,3485.43) C5.1@6357.44,3485.43 ; C4.1 C5.1 6309.57,3545.87 C7.1@6309.57,3701.4 ; C2.2 C3.2 6441.4,3569.57 C7.1@6309.57,3701.4 ; C12.1@7032.56,3259.57 ccw(c7062.88,3259.57) C12.1@7041.44,3238.13 ; P7.2@7064.73,2945.27 ccw(c7039.93,2970.07) 7075,2970.07 ccw(c7110.07,2970.07) 7085.27,2945.27 ccw(c7110.07,2970.07) 7110.07,2935 ccw(c7110.07,2899.93) P7.2@7085.27,2924.73
  other v1: 7510,2535 6265,2570 6360,2570 6455,2570 6550,2570 6645,2570 6740,2570 5735,2580 7555,2580 6265,2645 6360,2645 6455,2645 6550,2645 6645,2645 6740,2645 6855,2650 6950,2650 7445,2685 6080,3090 6410,3095 6625,3485 5965,3700 7380,3765 6625,3865 5910,3900 6950,4070 6615,4095
I2C_SCL: MCU1.47
I2C_SDA: MCU1.48
LED1: MCU1.59 R7.1 | length 595.8
  Top Layer w10: R7.1 6198.31,3508.74 MCU1.59 ; R7.1@5993.94,3319.06 ccw(c5993.94,3354.51) 6019.01,3329.44 ; R7.1@6002.56,3300.43 cw(c6032.88,3300.43) R7.1@6011.44,3321.87 ; R7.1@6012.56,3300.43 cw(c6067.02,3300.43) 6028.51,3338.94
NetC8_2: C8.2 MCU1.12 X1.3 | length 905.4
  Top Layer w10: MCU1.12 7169.69,3410.32 7200,3380 7200,3225 X1.3 7300,3125 C8.2 ; X1.3@7225.47,3175 ccw(c7166.26,3175) 7208.13,3216.87 ccw(c7250,3258.74) X1.3@7250,3199.53 ; X1.3@7235.47,3175 ccw(c7200.4,3175) 7225.2,3199.8 ccw(c7250,3224.6) X1.3@7250,3189.53 ; X1.3@7250,3150.47 cw(c7250,3091.26) 7291.87,3133.13 cw(c7333.74,3175) X1.3@7274.53,3175 ; X1.3@7250,3160.47 cw(c7250,3125.4) 7274.8,3150.2 cw(c7299.6,3175) X1.3@7264.53,3175 ; C8.2@7286.83,3073.6 ccw(c7255.04,3105.39) 7300,3105.39 ccw(c7344.96,3105.39) C8.2@7313.17,3073.6
NetC9_2: C9.2 MCU1.13 X1.1 | length 613.8
  Top Layer w10: MCU1.13 7195,3430 ; X1.1@7225.47,3375 ccw(c7166.26,3375) 7208.13,3416.87 ccw(c7250,3458.74) X1.1@7250,3399.53 ; X1.1@7235.47,3375 ccw(c7200.4,3375) 7225.2,3399.8 ccw(c7250,3424.6) X1.1@7250,3389.53 ; C9.2@7238.89,3466.01 cw(c7214.58,3450.42) 7235,3430 ; 7243.78,3438.78 ccw(c7225.28,3457.29) C9.2@7247.31,3471.41 ; C9.2@7248.26,3458.54 cw(c7245.03,3449.57) 7254.57,3449.57 ; X1.1 7195,3430 ; 7252.57,3447.57 ccw(c7235.99,3464.15) C9.2@7255.73,3476.81 ; C9.2 7254.57,3449.57 ; C9.2@7260.87,3458.54 ccw(c7264.1,3449.57) 7254.57,3449.57 ; 7195,3430 7235,3430 ; 7235,3430 7254.57,3449.57
NetC10_1: C10.1 MCU1.73 | length 280.3
  Top Layer w10: C10.1 6300,3195 6338.15,3233.15 ; C10.1@6302.59,3175.15 cw(c6336.76,3182.37) 6312.06,3207.06 ; C10.1@6312.37,3177.22 cw(c6358.29,3186.92) 6325.11,3220.11 ; C10.1@6322.16,3179.28 cw(c6379.83,3191.47) 6338.15,3233.15 ; MCU1.73 6338.15,3233.15
NetC11_2: C11.2 MCU1.49 | length 235.9
  Top Layer w10: C11.2@6491.83,3896.4 cw(c6460.04,3864.61) 6505,3864.61 cw(c6549.96,3864.61) C11.2@6518.17,3896.4 ; MCU1.49 6503.46,3823.11 6505,3824.64 C11.2
NetD1_2: D1.2 R1.2 | length 109.1
  Top Layer w30: D1.2 R1.2
NetD3_2: D3.2 R7.2 | length 288.4
  Top Layer w10: R7.2@5980.77,3216.4 cw(c5945.37,3181) 5995.43,3181 ; D3.2@5982.27,3122.1 ccw(c5950.48,3153.89) 5995.43,3153.89 ccw(c6040.39,3153.89) D3.2@6008.6,3122.1 ; R7.2@5987.84,3223.47 cw(c5969.51,3205.14) 5995.43,3205.14 ; R7.2 5995.43,3224.13 D3.2 ; 5995.43,3188.22 cw(c6035.28,3188.22) R7.2@6007.1,3216.4
NetMCU1_37: MCU1.37 R5.1 | length 230.4
  Top Layer w10: R5.1@6726.83,3891.4 cw(c6695.8,3860.37) 6739.69,3860.37 ; MCU1.37 6739.69,3904.25 R5.1 ; 6739.68,3858.85 cw(c6785.72,3858.85) R5.1@6753.17,3891.4
NetMCU1_81: MCU1.81
NetMCU1_82: MCU1.82
NetMCU1_83: MCU1.83
NetMCU1_84: MCU1.84
NetMCU1_85: MCU1.85
NetMCU1_86: MCU1.86
NetMCU1_87: MCU1.87
NetMCU1_88: MCU1.88
NetMCU1_94: MCU1.94 R4.1 | length 1236.2
  Top Layer w10: MCU1.94 6838.11,3453.11 v1(6890,3505) ; v1@6880,3505 cw(c6855.86,3505) 6872.93,3487.93 cw(c6890,3470.86) v1@6890,3495
  Bottom Layer w10: v1(6890,3505) 7075,3505 7130,3450 7130,3069.57 R4.1 ; v1@6897.07,3497.93 cw(c6914.14,3480.86) 6914.14,3505 cw(c6914.14,3529.14) v1@6897.07,3512.07 ; R4.1@7121.4,3082.1 ccw(c7100.64,3102.87) 7130,3102.87 ; 7130,3100.78 ccw(c7166.41,3100.78) R4.1@7140.66,3075.03 ; 7130,3124.92 ccw(c7190.55,3124.92) R4.1@7147.73,3082.1
NetR10_2: R10.2 SW2.1 | length 298.7
  Top Layer w30: SW2.1 5934.57,3980 R10.2 ; SW2.1@5792.23,3962.77 cw(c5833.83,3921.17) 5833.83,3980 cw(c5833.83,4038.83) SW2.1@5792.23,3997.23 ; 5909.11,3980 ccw(c5909.11,4021.52) R10.2@5938.47,3992.16
NRST: C1.2 MCU1.14 RST.2 | length 1535.5
  Top Layer w10: MCU1.14 7139.69,3449.69 7155,3465 v1(7180,3465) ; v1@7172.93,3457.93 ccw(c7155.86,3440.86) 7155.86,3465 ccw(c7155.86,3489.14) v1@7172.93,3472.07 ; v1@7360,3375 cw(c7360,3350.86) 7377.07,3367.93 cw(c7394.14,3385) v1@7370,3385 ; v1(7360,3385) 7390,3355 7390,3089.41 ; 7406.96,3072.45 ccw(c7464.49,3129.98) RST.2@7464.88,3048.62 ; 7413.29,3066.12 cw(c7371.42,3024.25) RST.2@7430.63,3024.25 ; 7423.91,3055.49 ccw(c7464.65,3096.23) RST.2@7464.93,3038.62 ; RST.2@7430.36,3049.05 cw(c7405.56,3024.25) RST.2@7440.63,3024.25 ; RST.2@7464.83,3058.62 cw(c7464.33,3163.73) 7390,3089.4 ; RST.2 7390,3089.41
  Top Layer w30: C1.2@7444.34,2850.03 ccw(c7394.45,2899.92) 7465,2899.92 ; RST.2@7447.77,2987.33 cw(c7406.17,2945.73) 7465,2945.73 cw(c7523.83,2945.73) RST.2@7482.23,2987.33 ; C1.2 7465,2854.57 RST.2
  Bottom Layer w10: v1@7180,3455 cw(c7180,3430.86) 7197.07,3447.93 cw(c7214.14,3465) v1@7190,3465 ; v1(7180,3465) 7215,3430 7315,3430 v1(7360,3385) 7355,3385 v1@7355,3380 ; v1@7350,3385 ccw(c7325.86,3385) 7342.93,3402.07 ccw(c7360,3419.14) v1@7360,3395
PWDN: P7.18 R13.1 | length 436
  Top Layer w10: R13.1@6141.83,3191.4 cw(c6110.04,3159.61) 6155,3159.61 cw(c6199.96,3159.61) R13.1@6168.17,3191.4 ; R13.1 6155,3090 6275,2970 ; P7.18@6260,2935 P7.18 6275,2970 ; P7.18@6266.63,2958.06 ccw(c6262.29,2970) 6275,2970 ; P7.18@6283.37,2958.06 cw(c6287.71,2970) 6275,2970
RESET: P7.17 R12.2 | length 478
  Top Layer w10: R12.2@6122.27,2642.1 ccw(c6090.48,2673.89) 6135.43,2673.89 ccw(c6180.39,2673.89) R12.2@6148.6,2642.1 ; R12.2 6135.43,2685.43 6275,2825 P7.17 ; 6226.06,2776.06 ccw(c6167.12,2835) P7.17@6250.47,2835 ; 6243.13,2793.13 ccw(c6201.26,2835) P7.17@6260.47,2835 ; 6250.2,2800.2 cw(c6275,2775.4) P7.17@6275,2810.47
SPI_MISO: MCU1.53
SPI_MOSI: MCU1.54
SPI_NCS: MCU1.51
SPI_SCK: MCU1.52
SW1: MCU1.58 SW2.2 | length 1280.7
  Top Layer w10: SW2.2@5757.8,3664.81 cw(c5740.57,3635) 5775,3635 ; SW2.2@5762.8,3673.47 cw(c5750.59,3652.33) 5775,3652.33 cw(c5799.41,3652.33) SW2.2@5787.2,3673.47 ; SW2.2 5775,3635 ; SW2.2@5792.2,3664.81 ccw(c5809.43,3635) 5775,3635 ; v2@5850,3550 ccw(c5825.86,3550) 5842.93,3567.07 ccw(c5860,3584.14) v2@5860,3560 ; v2(5860,3550) 5775,3635 ; v2(5885,3355) 5985,3355 6158.43,3528.43 MCU1.58 ; v2@5892.07,3347.93 cw(c5909.14,3330.86) 5909.14,3355 cw(c5909.14,3379.14) v2@5892.07,3362.07
  Bottom Layer w10: v2@5852.93,3542.93 cw(c5835.86,3525.86) 5860,3525.86 cw(c5884.14,3525.86) v2@5867.07,3542.93 ; v2(5860,3550) 5860,3390 5885,3365 v2(5885,3355) ccw(c5860.86,3355) 5877.93,3372.07 ; 5860.86,3389.14 cw(c5826.72,3355) v2@5875,3355
SWCLK: MCU1.76 P8.2 R9.1 | length 1100.5
  Top Layer w10: v2@6467.93,3012.07 ccw(c6429.66,3050.34) 6483.78,3050.34 ; 6483.78,3026.2 cw(c6453.8,3026.2) v2(6475,3005) 6483.78,3013.78 MCU1.76
  Bottom Layer w10: P8.2 6355,2725 6425,2795 6425,2955 v2(6475,3005) ; P8.2@5960.27,2714.73 cw(c5985.07,2689.93) 5985.07,2725 cw(c5985.07,2760.07) P8.2@5960.27,2735.27 ; P8.2@5967.34,2707.66 cw(c6009.21,2665.79) 6009.21,2725 cw(c6009.21,2784.21) P8.2@5967.34,2742.34 ; v2@6465,3005 cw(c6440.86,3005) 6457.93,2987.93 cw(c6475,2970.86) v2@6475,2995
SWDIO: MCU1.72 P8.4 R6.2 | length 1398
  Top Layer w10: R6.2 5945,2920 P8.4 ; R6.2@5828.6,2906.83 cw(c5860.39,2875.04) 5860.39,2920 cw(c5860.39,2964.96) R6.2@5828.6,2933.17 ; 5878.71,2920 ccw(c5878.71,2996.29) P8.4@5932.66,2942.34 ; P8.4@5932.66,2907.66 ccw(c5902.86,2877.86) 5902.86,2920 ccw(c5902.86,2972.14) P8.4@5939.73,2935.27 ; v2@6317.93,3022.93 ccw(c6300.86,3005.86) 6300.86,3030 ccw(c6300.86,3054.14) v2@6317.93,3037.07 ; v2(6325,3030) 6295,3030 6245,3080 6245,3220 6277.83,3252.83 MCU1.72
  Bottom Layer w10: P8.4 6035,3010 6305,3010 v2(6325,3030) ; P8.4@5950,2939.53 ccw(c5950,2974.6) 5974.8,2949.8 ccw(c5999.6,2925) P8.4@5964.53,2925 ; P8.4@5950,2949.53 ccw(c5950,3008.74) 5991.87,2966.87 ccw(c6033.74,2925) P8.4@5974.53,2925 ; v2@6315,3030 cw(c6290.86,3030) 6307.93,3012.93 cw(c6325,2995.86) v2@6325,3020
VREF+: L1.2 MCU1.21 | length 552.2
  Top Layer w10: MCU1.21 7132.48,3587.48 v3(7134.96,3585) ; 7104.83,3587.48 cw(c7104.83,3554.87) v3@7127.89,3577.93 ; 7116.81,3587.48 ccw(c7116.81,3603.15) v3@7127.89,3592.07
  Bottom Layer w10: L1.2 6980.43,3775 7055,3775 7134.96,3695.04 v3(7134.96,3585) ; L1.2@6988.6,3762.9 cw(c7017.82,3733.67) 7017.82,3775 ; L1.2@6988.6,3789.23 ccw(c7022.96,3823.59) 7022.96,3775 ; v3@7127.89,3592.07 ccw(c7110.82,3609.14) 7134.96,3609.14 ccw(c7159.1,3609.14) v3@7142.03,3592.07
pads on no net: MCU1.1 MCU1.2 MCU1.3 MCU1.4 MCU1.5 MCU1.6 MCU1.7 MCU1.8 MCU1.9 MCU1.15 MCU1.16 MCU1.17 MCU1.18 MCU1.30 MCU1.32 MCU1.35 MCU1.36 MCU1.38 MCU1.39 MCU1.40 MCU1.41 MCU1.42 MCU1.43 MCU1.44 MCU1.45 MCU1.46 MCU1.57 MCU1.60 MCU1.61 MCU1.62 MCU1.63 MCU1.64 MCU1.65 MCU1.66 MCU1.70 MCU1.71 MCU1.77 MCU1.78 MCU1.80 MCU1.89 MCU1.90 MCU1.91 P7.19 P7.20 X1.2

## Polygon pours and split planes (outlines as drawn)
GND on Top Layer "Top Layer" (hatched 90Degree grid 10 track 10, remove dead copper, pour order 12): 5565,4405 7480,4405 7685,4200 7655,4170 7655,2435 5640,2435 5600,2475 5550,2525 5550,4415 5550,4405 5560,4395
GND on Bottom Layer "Bottom Layer" (hatched 90Degree grid 10 track 10, remove dead copper, pour order 14): 5510,4350 5595,4265 7655,4265 7655,2480 7620,2445 7600,2465 5590,2465

## Keep-outs
Keep-Out Layer:
  lines w10: 7600,4065 7600,4075 7595,4080 7411.81,4080 7105,4080 6920,4265 6330,4265 6145,4080 5837.01,4080 5651.34,4080 5638.15,4066.81 5638.15,2496.85 5645,2490 5653.15,2490 5838.19,2490 7412.99,2490 7595,2490 7601.85,2496.85 7601.85,4066.81

## Silkscreen, mask and mechanical layers (free items; w line width, h text height)
Top Overlay:
  text "3.3" at 7400,3875 h60
  text "5V" at 6405,3750 h60 r90
  text "0" at 7535,3405 h60 r90
  text "RX" at 5845,3380 h60
  text "GND" at 5840,3275 h60
  text "3.3" at 5845,3170 h60
  text "SWD" at 5865,2995 h60
  text "IO" at 6025,2895 h60
  text "GND" at 6025,2785 h60
  text "CLK" at 6030,2690 h60
  text "3.3" at 6025,2515 h60

## Text inside footprints (layer, text, board x,y; h text height)
P7: Bottom Overlay "20" at 6115,2915 h50; Bottom Overlay "19" at 6115,2815 h50; Bottom Overlay "1" at 7175,2815 h50; Bottom Overlay "2" at 7175,2915 h50